# Altium PCB PCB1.PcbDoc
Units mm, origin at the board's own origin, x right, y up, seen from the top; angles counter-clockwise.
Board outline 86.89 x 37.44 mm, 2 copper layers (Top Layer, Bottom Layer); 17 components, 16 nets, 65 pads, 7 vias.
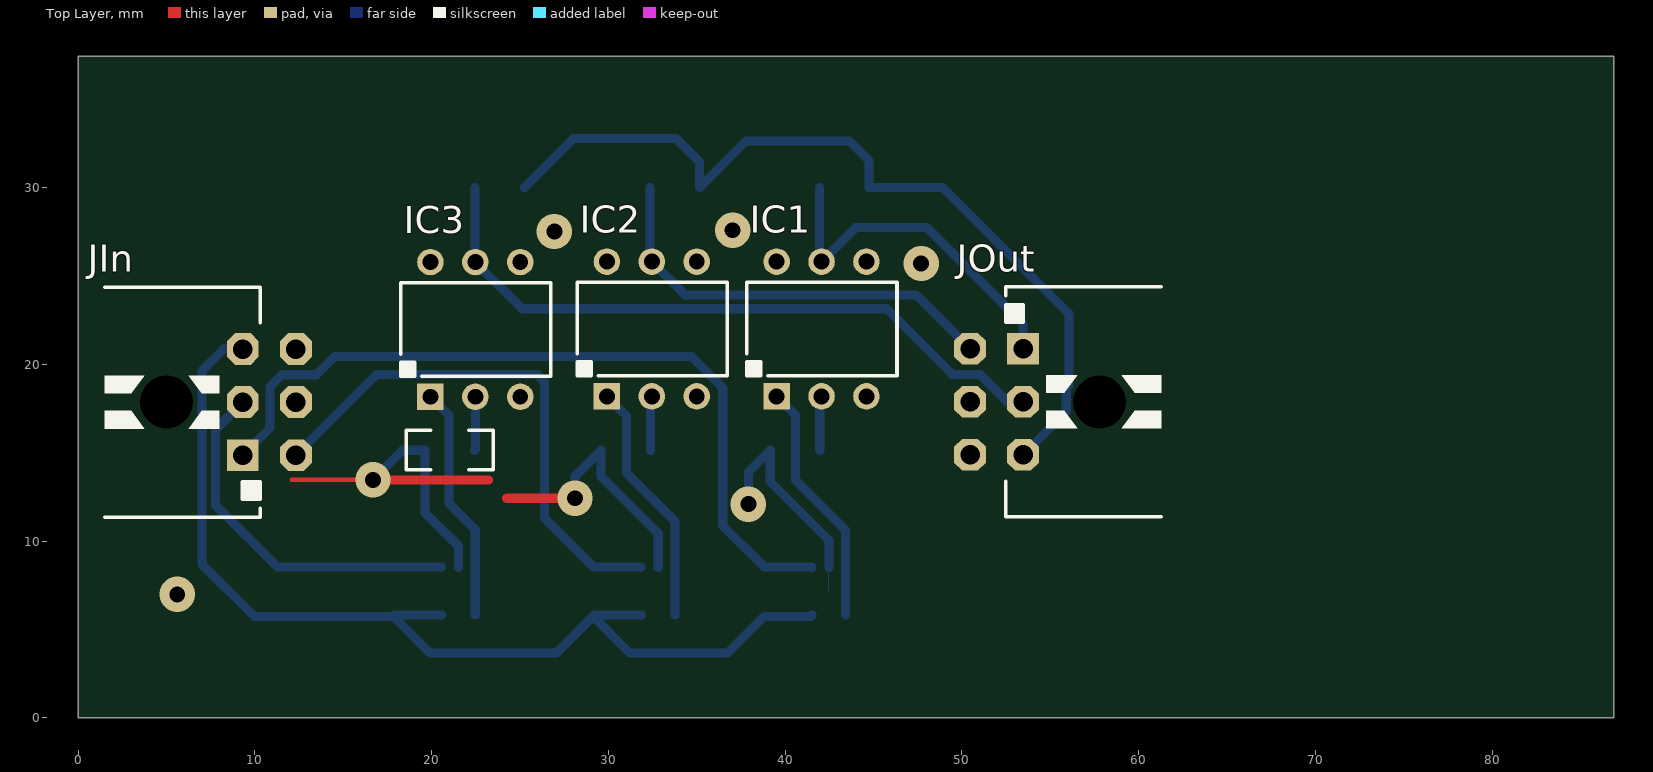
[diagram p0: Top Layer view]
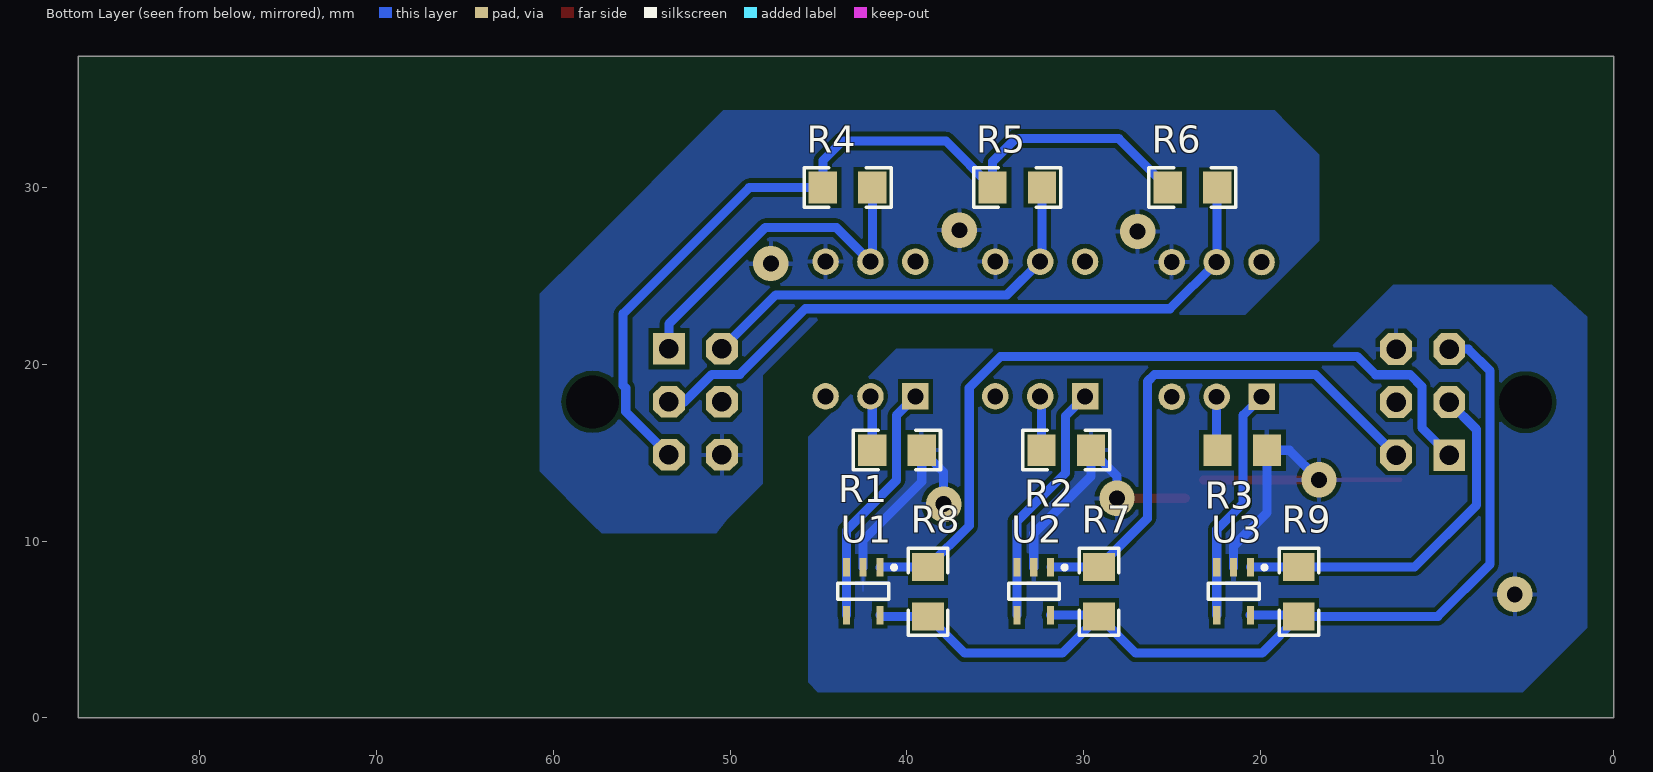
[diagram p1: Bottom Layer view, seen from below]

## Layer stack, top to bottom
Top Solder: solder mask 0.0102, Solder Resist, Dk 3.5
Top Layer: signal copper 0.0356
Dielectric 1: dielectric 0.32, FR-4, Dk 4.8
Bottom Layer: signal copper 0.0356
Bottom Solder: solder mask 0.0102, Solder Resist, Dk 3.5

## Board outline
0,0 86.893,0 86.893,37.44 0,37.44

## Design rules (kind name [scope] priority, off if disabled: settings)
Clearance [All] p1: gap=0.25
PolygonConnect [All] p1: connectstyle=Relief reliefconductorwidth=0.254 reliefentries=4 polygonreliefangle="90 Angle" airgapwidth=0.254
RoutingVias [All] p1: holewidth=0.711 width=1.27 viastyle="Through Hole" minholewidth=0.711 minwidth=1.27 maxholewidth=0.711 maxwidth=1.27
SolderMaskExpansion [All] p1: expansion=0.102
Width [All] p1: maxlimit=0.254 minlimit=0.254 preferedwidth=0.254
30 further rules are at their usual default settings.

## Components (designator, comment, footprint, x,y, rotation, side; value= is the part's Value field where it differs from the comment)
IC1 "4n25" DIP6 43.332,21.996 r0 top
IC2 "4n25" DIP6 33.731,21.996 r0 top
IC3 "4n25" DIP6 23.749,21.971 r0 top
JIn "Molex Microfit" "MICROFIT 3x2 Right Angle" 5.004,14.859 r270 top
JOut "Molex Microfit" "MICROFIT 3x2 Right Angle" 57.785,20.879 r90 top
R1 "390" 1206_R#1 40.564,15.138 r0 bottom
R2 "390" 1206_R#1 30.988,15.138 r0 bottom
R3 "390" 1206_R#2 21.031,15.138 r180 bottom
R4 "2.4k" 1206_R#1 43.358,29.997 r0 bottom
R5 "2.4k" 1206_R#1 33.757,29.997 r0 bottom
R6 "2.4K" 1206_R#1 23.851,29.997 r0 bottom
R7 "2.4k" 1206_R#1 29.134,7.137 r270 bottom
R8 "2.4k" 1206_R#1 38.811,7.137 r270 bottom
R9 "2.4k" 1206_R#1 17.831,7.137 r270 bottom
U1 "LPV321" 5SOT-23 41.529,8.509 r270 bottom
U2 "LPV321" 5SOT-23 31.877,8.509 r270 bottom
U3 "LPV321" 5SOT-23 20.574,8.509 r270 bottom

## Footprints (in the part's own frame and the unit in brackets; to place one, negate y for a bottom-side part, rotate by r counter-clockwise, add the part's x,y. Pads: shape width x height; smd on the part's side, far side on the other; paste and mask are expansions set on the pad)
5SOT-23 [mm]
  rect 1.05x0.4 smd: 1(0,0) 2(0,-0.95) 3(0,-1.9) 4(2.7,-1.9) 5(2.7,0)
  silkscreen extent -0.1,-2.38 1.8,0.9
1206_R#1 [mm]
  rect 1.6x1.8 smd: 1(-1.4,0) 2(1.4,0)
  silkscreen extent -2.46,-1.12 2.46,1.12, body extent -1.6,-0.8 1.6,0.8, height 0.8
1206_R#2 [mm]
  rect 1.6x1.8 smd: 1(1.4,0) 2(-1.4,0)
  body extent -1.6,-0.8 1.6,0.8, height 0.8
DIP6 [mm] "DIP; 8 Leads; Row Spacing 7.62 mm; Pitch 2.54 mm"
  rect 1.5x1.5 hole 0.9: 1(-3.81,-3.81)
  round 1.5 hole 0.9: 2(-1.27,-3.81) 3(1.27,-3.81) 4(1.27,3.81) 5(-1.27,3.81) 6(-3.81,3.81)
  silkscreen extent -5.5,-2.65 3,2.65
"MICROFIT 3x2 Right Angle" [mm] "Molex Right Angle 3.00mm pitch Micro-Fit 3.0 Wire-to-Board Header"
  rect 1.8x1.8 hole 1.1: 1(0,4.32)
  oct 1.8x1.8 hole 1.1: 2(-3,4.32) 3(-6,4.32) 4(0,7.32) 5(-3,7.32) 6(-6,7.32)
  rect 0x0 hole 3 unplated: MH(-3,0)
  silkscreen extent -9.5,-3.5 3.5,5.3, body extent -9.57,-4.7 3.58,7.54, height 8.83

## Part data
JIn JOut: library part "Microfit 3x2"
R1 R2 R3 R4 R5 R6 R7 R8 R9: library part R, "Resistor"

## Via types
v1: diameter 2, hole 0.9, Top Layer to Bottom Layer, 7 vias

## Nets (pads, with @x,y where several pads share a name; then routed paths per layer and width w, separated by ;. In a path a pad name is that pad's centre, name@x,y a point inside that pad or via, vN(x,y) a via of type N, cw(c..) or ccw(c..) an arc to the next point about the centre after c; other vN are vias at no path point)
GND: IC1.4 IC2.4 IC3.4 JOut.6
  other v1: 47.701,25.705 26.949,27.508 37.033,27.584
NetIC1_1: IC1.1 U1.3 U1.4 | length 14
  Bottom Layer w0.516: IC1.1 40.589,17.12 40.589,13.437 43.429,10.597 U1.3 U1.4
NetIC1_2: IC1.2 R1.2 | length 3.1
  Bottom Layer w0.516: R1.2 41.964,18.088 IC1.2
NetIC1_5: IC1.5 JOut.1 R4.1 | length 20.1
  Bottom Layer w0.516: R4.1 41.958,25.911 IC1.5 43.993,27.737 48.006,27.737 53.465,22.278 JOut.1
NetIC2_1: IC2.1 U2.3 U2.4 | length 14
  Bottom Layer w0.516: IC2.1 31.039,17.069 31.039,13.843 33.777,11.105 U2.3 U2.4
NetIC2_2: IC2.2 R2.2 | length 3.1
  Bottom Layer w0.516: R2.2 32.388,18.113 IC2.2
NetIC2_5: IC2.5 JOut.4 R5.1 | length 24.3
  Bottom Layer w0.516: R5.1 32.357,25.911 IC2.5 34.341,23.927 47.417,23.927 JOut.4
NetIC3_1: IC3.1 U3.3 U3.4 | length 13.4
  Bottom Layer w0.516: IC3.1 20.98,17.12 20.98,12.141 22.474,10.648 U3.3 U3.4
NetIC3_2: IC3.2 R3.2 | length 3
  Bottom Layer w0.516: R3.2 22.479,15.186 IC3.2
NetIC3_5: IC3.5 JOut.2 R6.1 | length 38.5
  Bottom Layer w0.516: R6.1 22.451,25.809 IC3.5 25.121,23.139 45.745,23.139 49.454,19.431 51.029,19.431 52.581,17.879 JOut.2
NetJIn_1: JIn.1 R8.1 U1.1 | length 45.4
  Bottom Layer w0.516: JIn.1 10.871,16.406 10.871,18.745 11.532,19.406 13.487,19.406 14.529,20.447 34.696,20.447 36.474,18.669 36.474,10.874 R8.1 41.501,8.537 U1.1
NetJIn_2: JIn.2 R9.1 U3.1 | length 20.7
  Bottom Layer w0.516: JIn.2 7.778,16.313 7.778,12.034 11.275,8.537 R9.1 U3.1@20.546,8.537
NetJIn_4: JIn.4 R7.1 U2.1 | length 30.5
  Bottom Layer w0.516: JIn.4 16.896,19.431 25.984,19.431 26.391,19.025 26.391,11.281 R7.1 U2.1@31.849,8.537
SGND: JIn.6 R1.1 R2.1 R3.1 U1.2 U2.2 U3.2 | length 50.7
  Top Layer w0.254: 12.09,13.462 v1(16.688,13.462)
  Top Layer w0.516: v1(16.688,13.462) 23.216,13.462 ; 24.257,12.421 v1(28.118,12.421) ; v1@37.592,12.421 v1(37.922,12.09)
  Bottom Layer w0: 42.479,7.173 U1.2
  Bottom Layer w0.516: v1(16.688,13.462) 18.364,15.138 R3.1 19.631,11.611 21.524,9.718 U3.2 ; v1(28.118,12.421) 28.118,13.668 R2.1 29.588,13.668 32.827,10.429 U2.2 ; v1(37.922,12.09) 37.922,13.897 R1.1 39.164,13.363 42.479,10.048 U1.2
  other v1: 5.613,6.985
V5: JIn.3 R7.2 R8.2 R9.2 U1.5 U2.5 U3.5 | length 58.5
  Bottom Layer w0.516: JIn.3 8.235,20.859 7.012,19.636 7.012,8.685 9.96,5.737 R9.2 ; U3.5 17.902,5.809 R9.2 ; U2.5 29.205,5.809 R7.2 ; U1.5 41.457,5.737 R8.2 36.731,3.658 31.214,3.658 R7.2 ; R9.2 19.911,3.658 27.054,3.658 R7.2
V24: JOut.3 R4.2 R5.2 R6.2 | length 49.1
  Bottom Layer w0.516: R6.2 28.019,32.766 33.858,32.766 35.157,31.468 R5.2 37.798,32.639 43.637,32.639 44.758,31.518 R4.2 48.92,29.997 56.058,22.86 56.058,18.806 55.908,18.656 55.908,17.322 JOut.3
pads on no net: IC1.3 IC1.6 IC2.3 IC2.6 IC3.3 IC3.6 JIn.5 JIn.MH JOut.5 JOut.MH

## Polygon pours and split planes (outlines as drawn)
GND on Bottom Layer "Bottom Layer-No Net" (solid, pour order 6): 50.165,11.227 48.158,13.233 48.158,19.38 44.933,22.606 44.729,22.809 23.317,22.809 20.853,22.809 16.891,26.772 16.688,26.975 16.688,29.794 16.688,31.852 18.364,33.528 19.202,34.366 48.387,34.366 50.394,34.366 58.522,26.238 60.782,23.978 60.782,14.503 60.782,13.945 57.76,10.922 57.277,10.439 50.775,10.439
SGND on Bottom Layer "Bottom Layer-No Net" (solid, pour order 8): 12.497,24.486 16.104,20.879 40.615,20.879 45.593,15.9 45.593,2.007 45.39,1.803 45.034,1.448 6.985,1.448 5.156,1.448 3.226,3.378 1.499,5.105 1.499,22.454 1.499,22.682 3.531,24.486

## Silkscreen, mask and mechanical layers (free items; w line width, h text height)
Mechanical 1:
  lines w1.2: 0,-0.076 62.027,-0.076 62.027,35.56 0,35.56 0,-0.076